# Altium PCB PCB_Control.V03.R00.PcbDoc (part 6 of 7)
Units mm, origin at the board's own origin, x right, y up, seen from the top; angles counter-clockwise.
Board outline 188 x 90 mm, 6 copper layers (Top Layer, GND 1, PWR, Signal L4, GND 2, Bottom Layer), stack 1.548 mm thick; 541 components, 265 nets, 1491 pads, 2159 vias.
Unrouted connection lines stored in the file: 819.
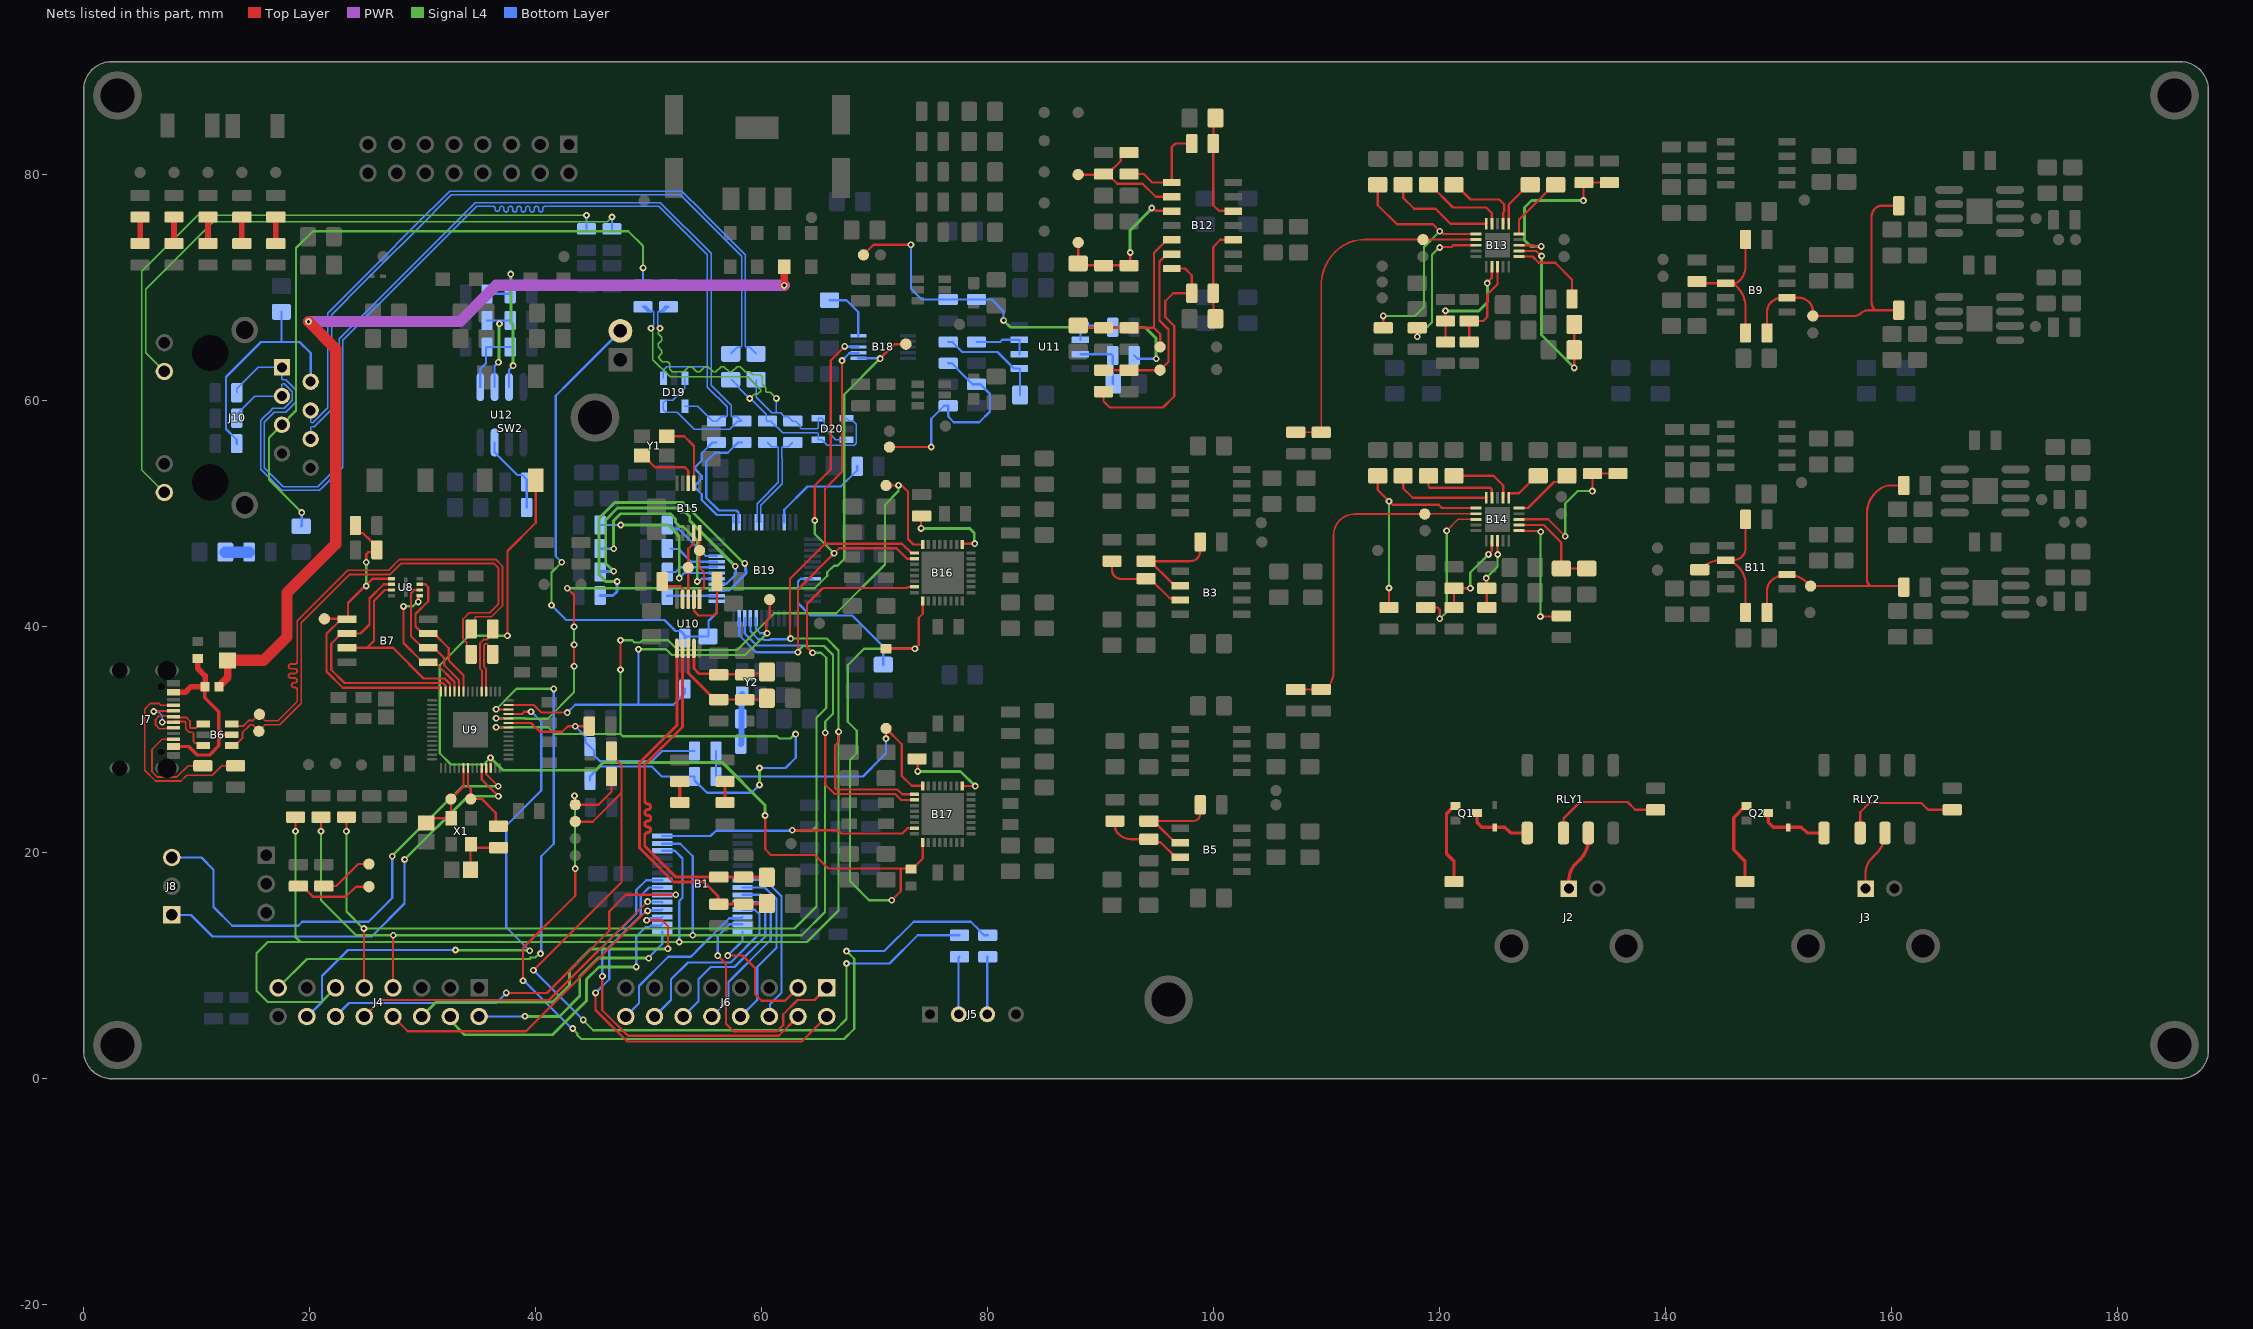
[diagram p9: the nets of this part, all layers, seen from the top]

## Via types
v1: diameter 0.6, hole 0.3, Top Layer to Bottom Layer, tented both sides, 1686 vias
v2: diameter 0.6, hole 0.3, Top Layer to Bottom Layer, 448 vias
v3: diameter 0.5, hole 0.2, Top Layer to Bottom Layer, tented both sides, 16 vias
v4: diameter 0.6, hole 0.25, Top Layer to Bottom Layer, tented both sides, 9 vias

## Nets (pads, with @x,y where several pads share a name; then routed paths per layer and width w, separated by ;. In a path a pad name is that pad's centre, name@x,y a point inside that pad or via, vN(x,y) a via of type N, cw(c..) or ccw(c..) an arc to the next point about the centre after c; other vN are vias at no path point) (continued)
MCU_GPIO24: B16.32 R38.2 R40.1 TP22.1 U9.36 | length 103.2
  Top Layer w0.2: v1(36.5,31.1) 36.518,31.082 U9.36@37.592,31.082 ; v1(47.5,36.2) v1(47.5,38.8) ; TP22.1@71,52.5 v1(72.1,52.5) 72.4,52.5 72.95,51.95 72.95,47.75 73.429,47.271 B16.32@74.25,47.271
  Signal L4 w0.2: v1(36.5,31.1) 41.1,31.1 41.7,30.5 47.5,30.5 ; v1(47.5,36.2) 47.5,30.5 ; v1(47.5,38.8) 48.551,38.8 48.751,38.6 49.249,38.6 49.449,38.8 51.7,38.8 52.566,37.934 57.834,37.934 61.1,41.2 66.6,41.2 70.9,45.5 70.9,50.8 72.1,52 v1(72.1,52.5) ; v1(63,30.5) 62.951,30.5 62.551,30.1 61.549,30.1 61.349,30.3 47.7,30.3 47.5,30.5
  Signal L4 w0.254: v1(59.8,26) v1(59.8,27.5)
  Bottom Layer w0.2: R38.2@44.8,26.4 44.8,26.736 45.689,27.625 50.275,27.625 51.15,26.75 R40.1@54.05,26.75 54.05,26.4 55.15,25.3 59.1,25.3 v1(59.8,26) ; v1(59.8,27.5) 62.1,27.5 63,28.4 v1(63,30.5)
MCU_GPIO25: R39.2 R41.1 R46.1 U9.37 | length 20.4
  Top Layer w0.2: U9.37@37.592,31.482 39.594,31.482 40.376,30.7 42.349,30.7 42.849,31.2 v1(43.5,31.2) R46.1@44.75,31.2
  Bottom Layer w0.2: v1(43.5,31.2) 44.415,30.285 44.415,29.785 45.185,29.015 45.185,28.615 45.7,28.1 50.3,28.1 51.2,29 R41.1@54.05,29
MCU_GPIO26: B18.6 TP44.1 U9.38 | length 68
  Top Layer w0.2: v1(36.5,31.9) 36.518,31.882 U9.38@37.592,31.882 ; v1(42.8,43.4) 43.4,42.8 v1(43.4,40) ; v1(43.4,36.5) v1(43.4,38.4) ; v1(70.475,63.725) 71.75,65 TP44.1@72.75,65
  Signal L4 w0.2: v1(36.5,31.9) 39.029,31.9 39.062,31.867 41.067,31.867 43.4,34.2 v1(43.4,36.5) ; v1(42.8,43.4) 53.083,43.4 53.088,43.396 64.696,43.396 65.8,44.5 65.8,44.814 66.386,45.4 66.7,45.4 67.3,46 67.3,60.55 v1(70.475,63.725) ; v1(43.4,38.4) v1(43.4,40)
  Bottom Layer w0.2: B18.6@68.55,63.75 70.45,63.75 v1(70.475,63.725)
MCU_GPIO27: J4.14 U9.39 | length 49.3
  Top Layer w0.2: U9.39@37.592,32.282 38.812,32.282 38.997,32.467 v1(39.585,32.467)
  Signal L4 w0.2: v1(32.9,11.4) 32.937,11.363 39.437,11.363 v1(39.474,11.326)
  Bottom Layer w0.2: J4.14@19.75,5.51 19.81,5.51 21.1,6.8 21.1,9.1 23.4,11.4 v1(32.9,11.4) ; v1(39.474,11.326) 37.4,13.4 37.4,22.4 40.5,25.5 40.5,31.6 39.633,32.467 v1(39.585,32.467)
MCU_GPIO28: J4.15 U9.40 | length 55.3
  Top Layer w0.2: v1(36.5,32.7) 36.518,32.682 U9.40@37.592,32.682
  Signal L4 w0.2: J4.15@17.21,8.05 19.76,10.6 39.449,10.6 39.574,10.726 39.969,10.726 40.317,11.074 v1(40.426,11.074) ; v1(36.5,32.7) 38.3,34.5 v1(41.6,34.5)
  Bottom Layer w0.2: v1(40.426,11.074) 40.5,11.149 40.5,19.7 41.6,20.8 v1(41.6,34.5)
MCU_GPIO29: B19.32 R154.2 TP85.1 U9.41 | length 39.5
  Top Layer w0.2: U9.41@37.592,33.082 39.818,33.082 40.5,32.4 v1(42.8,32.4) ; v1(60.474,39.426) 60.4,39.5 60.4,40.5 60.7,40.8 TP85.1@60.7,42.4
  Signal L4 w0.2: v1(49.1,38) 51.531,38 52.031,37.5 58.549,37.5 v1(60.474,39.426)
  Bottom Layer w0.2: v1(42.8,32.4) 43.5,33.1 49.1,33.1 ; v1(49.1,38) 49.1,33.1 ; R154.2@53.2,34.5 53.2,34.136 52.164,33.1 49.1,33.1 ; B19.32@59.5,40.762 59.5,39.8 59.874,39.426 v1(60.474,39.426)
MCU_QSPI_SCLK: B7.6 U8.6 U9.52 | length 12
  Top Layer w0.2: U8.6@29.7,43.2 U8.6@29.75,43.25 29.25,43.25 28.975,42.975 28.975,39.155 30,38.13 B7.6@30.5,38.13 31,38.13 31.9,37.23 31.9,36.587 33.217,35.27 U9.52@33.217,34.257
MCU_QSPI_SD0: B7.5 U8.5 U9.53 | length 12.2
  Top Layer w0.2: v1(28.3,41.8) 28.3,38.56 30,36.86 B7.5@30.5,36.86 30.725,36.635 31.286,36.635 32.817,35.104 U9.53@32.817,34.257 ; v1(29.604,42.196) 29.604,42.7 29.654,42.75 U8.5@29.75,42.75
  Signal L4 w0.2: v1(28.3,41.8) 29.151,41.8 29.548,42.196 v1(29.604,42.196)
MCU_QSPI_SD1: B7.2 U8.2 U9.55 | length 22.4
  Top Layer w0.2: U8.2@27.25,43.75 26.55,43.75 25.3,42.5 25.3,40.2 24.5,39.4 B7.2@23.3,39.4 22.8,39.4 21.9,38.5 21.9,36.2 23.081,35.019 31.771,35.019 32.017,34.773 U9.55@32.017,34.257
MCU_QSPI_SD2: B7.3 U8.3 U9.54 | length 17.6
  Top Layer w0.2: B7.3@23.3,38.13 25.07,38.13 ; U8.3@27.2,43.2 U8.3@27.25,43.25 26.65,43.25 25.7,42.3 25.7,38.76 25.07,38.13 ; U9.54@32.417,34.257 32.417,34.938 31.936,35.419 30.081,35.419 27.37,38.13 25.07,38.13
MCU_QSPI_SD3: B7.7 U8.7 U9.51 | length 13
  Top Layer w0.2: U8.7@29.8,43.7 U8.7@29.75,43.75 30.247,43.75 30.5,43.497 30.5,42.244 29.375,41.119 29.375,40.025 30,39.4 31,39.4 32.3,38.1 32.3,37.012 33.617,35.695 U9.51@33.617,34.257
MCU_QSPI_SS: B7.1 R66.2 R68.2 TP56.1 U8.1 U9.56 | length 31
  Top Layer w0.2: TP56.1@21.3,40.7 B7.1@22.8,40.7 ; B7.1@22.8,40.67 21.5,39.37 21.5,36.034 22.934,34.6 31.617,34.6 U9.56@31.617,34.257 ; B7.1@23.27,40.7 23.4,40.83 23.4,42.1 24.9,43.6 v1(25,43.6) 25,43.7 25.55,44.25 U8.1@27.25,44.25 ; R66.2@24.05,48.95 24.05,48.698 24.448,48.299 24.701,48.299 25.465,47.535 25.552,47.535 25.95,47.136 R68.2@25.95,46.8 25.75,46.6 25.2,46.6 25,46.4 v1(25,45.7)
  Signal L4 w0.2: v1(25,43.6) v1(25,45.7)
MCU_USB_N: R67.1 U9.46 | length 5.7
  Top Layer w0.16: U9.46@35.617,34.257 35.617,34.618 35.597,34.638 35.597,36.292 35.435,36.454 35.435,38.401 35.529,38.495 35.686,38.495 35.808,38.373 35.808,37.942 R67.1@36.2,37.55
MCU_USB_P: R65.1 U9.47 | length 6.3
  Top Layer w0.16: U9.47@35.217,34.257 35.217,34.618 35.237,34.638 35.237,36.143 35.075,36.305 35.075,38.55 35.38,38.855 35.686,38.855 35.808,38.976 35.808,39.408 R65.1@36.2,39.8
MCU_XIN: C85.2 TP57.1 U9.20 X1.1 | length 7.3
  Top Layer w0.2: C85.2@30.3,22.625 30.725,23.05 X1.1@32.525,23.05 32.5,23.075 TP57.1@32.5,24.75 33.614,25.864 33.614,26.954 33.617,26.957 U9.20@33.617,27.507
MCU_XOUT: R69.2 TP58.1 U9.21 | length 6.9
  Top Layer w0.2: U9.21@34.017,27.507 34.017,25.883 34.25,25.65 TP58.1@34.25,24.75 35.25,24.75 36.473,23.527 36.473,22.577 R69.2@36.7,22.35
NetB13_11: B13.11 R96.2 | length 7.2
  Top Layer w0.2: B13.11@127,72.75 128.201,72.75 128.751,72.2 130.2,72.2 131.7,70.7 R96.2@131.7,69
NetB13_12: B13.12 C115.2 C116.2 | length 17.1
  Top Layer w0.2: B13.12@127,73.25 128.529,73.25 128.979,72.8 v1(129,72.8) ; C116.2@131.893,66.75 C115.2@131.893,64.5 131.9,64.493 v1(131.9,62.9)
  Signal L4 w0.254: v1(129,72.8) 129,65.8 v1(131.9,62.9)
NetB14_11: B14.11 R105.2 | length 11.4
  Top Layer w0.2: B14.11@127,48.5 127.025,48.475 128.851,48.475 v1(128.926,48.4) ; v1(128.9,40.9) 130.7,40.9 R105.2@130.75,40.95
  Signal L4 w0.2: v1(128.9,40.9) 128.913,40.913 128.913,42.667 128.9,42.68 128.9,43.177 128.913,43.19 128.913,48.387 v1(128.926,48.4)
NetB14_12: B14.12 C126.2 C127.2 | length 8.9
  Top Layer w0.2: B14.12@127,49 129.2,49 130.75,47.45 C126.2@130.75,45.143 C127.2@133,45.143
NetB16_25: B16.25 R108.1 | length 8.1
  Top Layer w0.2: v1(74.1,48.7) 74.1,49.75 R108.1@74.15,49.8 ; B16.25@77.75,47.271 77.75,47.301 77.8,47.351 v1(78.851,47.351)
  Signal L4 w0.254: v1(74.1,48.7) 78.4,48.7 78.8,48.3 78.8,47.402 v1(78.851,47.351)
NetB17_25: B17.25 R111.1 | length 7.9
  Top Layer w0.2: R111.1@73.75,28.3 73.8,28.25 v1(73.8,27.2) ; B17.25@77.75,25.925 77.775,25.9 v1(78.901,25.901) v1(78.901,25.901)
  Signal L4 w0.254: v1(73.8,27.2) 77.6,27.2 78.899,25.901 v1(78.901,25.901)
NetB17_32: B17.32 R40.2 R41.2 TP23.1 | length 27.3
  Top Layer w0.2: v1(71,30.1) TP23.1@71,31 72.4,29.6 72.4,26.8 73.275,25.925 B17.32@74.25,25.925
  Bottom Layer w0.2: R41.2@55.95,29 R40.2@55.95,26.75 68.95,26.75 70.6,28.4 71,28.8 v1(71,30.1)
NetB18_10: B18.10 C174.1 | length 5.1
  Bottom Layer w0.2: C174.1@66,68.893 67.507,68.893 68.55,67.85 B18.10@68.55,65.75
NetB19_10: B19.10 R164.2 | length 9.4
  Bottom Layer w0.2: B19.10@62,49.238 62,50.351 64.049,52.4 67,52.4 68.45,53.85 R164.2@68.45,54.2
NetC173_2: C173.2 R125.2 U11.3 | length 5.4
  Bottom Layer w0.2: U11.3@88.2,64.115 90.935,64.115 R125.2@91.05,64 91.05,61.557 C173.2@91.107,61.5
NetC175_2: C175.2 R129.2 U11.5 | length 9.6
  Bottom Layer w0.2: R129.2@76.5,65.2 76.85,65.2 77.75,64.3 80.87,64.3 82.325,62.845 U11.5@82.8,62.845 82.857,62.788 C175.2@82.857,60.5
NetC183_1: C183.1 J10.2 R150.1 | length 20.7
  Bottom Layer w0.2: R150.1@13.55,56.2 13.55,56.55 12.6,57.5 12.6,62.1 15.7,65.2 17.5,65.2 ; C183.1@17.5,67.857 17.5,65.2 ; J10.2@20.09,61.68 20.09,64.21 19.1,65.2 17.5,65.2
NetC186_2: C186.2 R162.1 | length 2.1
  Bottom Layer w1: C186.2@12.543,46.6 R162.1@14.65,46.6
NetD5_A: D5.A R1.1 | length 2.4
  Top Layer w0.5: D5.A@17,73.9 R1.1@17,76.25
NetD6_A: D6.A R2.1 | length 2.4
  Top Layer w0.5: D6.A@14,73.9 R2.1@14,76.25
NetD7_A: D7.A R3.1 | length 2.4
  Top Layer w0.5: D7.A@11,73.9 R3.1@11,76.25
NetD8_K: D8.K R4.1 | length 2.4
  Top Layer w0.5: D8.K@8,73.9 R4.1@8,76.25
NetD9_K: D9.K R5.1 | length 2.4
  Top Layer w0.5: D9.K@5,73.9 R5.1@5,76.25
NetD11_2: D11.2 Q1.3 RLY1.1 | length 5.7
  Top Layer w0.3: Q1.3@123.29,23.5 123.29,22.676 123.711,22.255 D11.2@124.84,22.255 125.745,22.255 126.25,21.75 RLY1.1@127.739,21.75
NetD12_2: D12.2 Q2.3 RLY2.1 | length 6.1
  Top Layer w0.3: Q2.3@149.04,23.5 149.04,22.71 149.5,22.25 150.835,22.25 D12.2@150.84,22.255 151.995,22.255 152.5,21.75 RLY2.1@153.989,21.75
NetD13_A: D13.A R49.1 | length 1.8
  Top Layer w0.3: D13.A@52.75,24.45 R49.1@52.75,26.3
NetD14_A: D14.A R50.1 | length 1.8
  Top Layer w0.3: D14.A@56.75,24.45 R50.1@56.75,26.3
NetJ10_10: J10.10 R152.1 | length 52.9
  Signal L4 w0.152: J10.10@7.14,62.59 5.5,64.23 5.5,69.848 11.476,75.824 46.324,75.824 v1(46.75,76.25)
  Bottom Layer w0.2: R152.1@46.75,75.2 v1(46.75,76.25)
NetJ10_12: J10.12 R153.1 | length 63
  Signal L4 w0.152: J10.12@7.14,51.88 5.148,53.872 5.148,71.463 10.085,76.4 v1(44.5,76.4)
  Bottom Layer w0.2: R153.1@44.5,75.2 v1(44.5,76.4)
NetQ1_1: Q1.1 R18.1 | length 7.4
  Top Layer w0.3: R18.1@121.25,17.45 121.25,19.25 120.59,19.91 120.59,23.45 121.29,24.15 Q1.1@121.39,24.15
NetQ2_1: Q2.1 R20.1 | length 7.6
  Top Layer w0.3: R20.1@147,17.45 147,19.25 146,20.25 146,23.11 147.04,24.15 Q2.1@147.14,24.15
NetR124_1: R124.1 R125.1 R127.2 TP82.1 | length 36.3
  Top Layer w0.2: TP82.1@69,72.9 69.9,73.8 v1(73.2,73.8)
  Signal L4 w0.254: v1(81.4,67.1) 82,66.5 93.9,66.5 94.9,65.5 v1(94.9,63.7)
  Bottom Layer w0.2: v1(73.2,73.8) 73.2,69.9 74.15,68.95 R124.1@76.5,68.95 R127.2@79,68.95 80.35,68.95 81.4,67.9 v1(81.4,67.1) ; R125.1@92.95,64 93.25,63.7 v1(94.9,63.7)
NetR126_1: R126.1 U11.1 U11.2 | length 4.2
  Bottom Layer w0.2: U11.2@88.2,65.385 U11.1@88.2,66.655 90.895,66.655 R126.1@91.05,66.5
NetR128_1: R128.1 R129.1 R131.2 TP84.1 | length 19.8
  Top Layer w0.2: TP84.1@71.3,55.9 v1(75,55.9)
  Bottom Layer w0.2: v1(75,55.9) 75,58.4 76.15,59.55 R128.1@76.5,59.55 76.5,58.6 77,58.1 79.251,58.1 80.2,59.049 80.2,60.6 79.35,61.45 R131.2@79,61.45 78.65,61.45 77.235,62.865 77.235,62.902 76.836,63.3 R129.1@76.5,63.3
NetR130_1: R130.1 U11.6 U11.7 | length 5.1
  Bottom Layer w0.2: R130.1@79,65.2 81.1,65.2 81.285,65.385 U11.7@82.8,65.385 U11.6@82.8,64.115
NetR132_1: R132.1 R136.1 U12.7 | length 7.2
  Bottom Layer w0.2: U12.7@36.365,56.3 36.365,55.436 38.376,53.425 38.802,53.425 39.2,53.027 R136.1@39.2,52.8 R132.1@39.2,50.55
NetR133_1: R133.1 R137.2 U12.1 | length 5.9
  Bottom Layer w0.2: U12.1@35.095,61.2 35.095,62.795 35.6,63.3 35.6,64.65 R133.1@35.7,64.75 R137.2@37.75,64.75
NetR134_1: R134.1 R138.2 U12.2 | length 8.1
  Signal L4 w0.254: v1(36.7,63.4) 36.75,63.45 36.75,66.75 v1(36.8,66.8)
  Bottom Layer w0.2: R134.1@35.7,67.1 v1@36.8,67.1 ; U12.2@36.365,61.2 36.365,63.065 v1(36.7,63.4) ; v1(36.8,66.8) v1@36.8,67.1 ; R138.2@37.75,67.1 v1@36.8,67.1
NetR135_1: R135.1 R139.2 U12.3 | length 14.1
  Signal L4 w0.254: v1(37.8,71.2) 37.8,66.9 38,66.7 v1(38,63.1)
  Bottom Layer w0.2: R135.1@35.7,69.45 R139.2@37.75,69.45 37.8,69.5 v1(37.8,71.2) ; U12.3@37.635,61.2 37.635,62.735 v1(38,63.1)
NetR166_2: R166.2 R167.2 Y2.1 | length 4.5
  Bottom Layer w0.5: R166.2@58.15,29.6 58.213,29.663 58.213,33.987 Y2.1@58.275,34.05
NEXTION_RX: J5.3 R42.2 | length 5.1
  Bottom Layer w0.2: J5.3@79.96,5.7 79.96,10.76 R42.2@80,10.8
NEXTION_TX: J5.2 R44.2 | length 5.1
  Bottom Layer w0.2: J5.2@77.42,5.7 77.42,10.72 R44.2@77.5,10.8
OFFSET_VIN_Offset1: B9.2 R70.2 R71.1 R72.2 | length 11.7
  Top Layer w0.2: R70.2@142.75,70.55 ccw(c143.148,70.948) 143.148,70.385 B9.2@145.288,70.385 ; R71.1@147.05,66 147.05,68.264 ccw(c144.51,68.264) 146.306,70.06 145.981,70.385 ccw(c145.981,71.119) 146.5,70.6 ccw(c145.172,71.928) 147.05,71.928 R72.2@147.05,74.25
OFFSET_VIN_Offset2: B11.2 R75.2 R76.1 R77.2 | length 12.2
  Top Layer w0.2: R75.2@143,45.05 143.091,45.141 cw(c144.887,43.345) B11.2@144.887,45.885 ; B11.2@145.288,45.885 B11.2@145.638,45.819 ; B11.2@145.76,45.794 B11.2@145.638,45.818 ; B11.2@145.759,45.886 145.95,45.887 ccw(c145.936,47.057) 146.761,46.227 ccw(c146.07,46.922) 147.05,46.92 147.05,48.775 R77.2@147.05,49.5 ; R76.1@147.05,41.25 147.05,43.749 ccw(c144.815,43.741) 145.951,45.666 B11.2@145.638,45.819
OFFSET_VOUT_Amplificador1: B9.6 R7.1 R10.1 R71.2 TP62.1 | length 26.8
  Top Layer w0.2: R71.2@148.95,66 148.95,67.855 cw(c150.145,67.855) 149.3,68.7 cw(c150.302,67.698) 150.302,69.115 B9.6@150.712,69.115 151.698,69.115 cw(c151.698,67.698) 152.7,68.7 cw(c151.976,67.976) 153,67.976 TP62.1@153,67.5 156.717,67.5 ccw(c156.717,68.183) 157.2,67.7 cw(c157.924,66.976) 157.924,68 158.5,68 ; R10.1@160.6,68 158.5,68 ; R7.1@160.6,77.25 159.104,77.25 ccw(c159.104,76.396) 158.5,77 ccw(c159.224,76.276) 158.2,76.276 158.2,68.724 ccw(c159.224,68.724) 158.5,68
OFFSET_VOUT_Amplificador2: B11.6 R13.1 R16.1 R76.2 TP67.1 | length 26.4
  Top Layer w0.2: R76.2@148.95,41.25 148.95,43.237 ; 148.95,43.238 cw(c150.055,43.238) 149.274,44.019 cw(c150.712,42.581) 150.05,44.504 B11.6@150.712,44.615 150.733,44.615 cw(c150.733,42.075) 152.529,43.871 TP67.1@152.8,43.6 158.1,43.6 ; R16.1@161.05,43.5 ccw(c160.809,43.259) 160.809,43.6 158.1,43.6 ; R13.1@161.05,52.5 159.907,52.5 ccw(c159.907,50.793) 158.7,52 ccw(c160.323,50.068) 157.8,50.069 157.8,44.099 ccw(c158.283,44.1) 157.94,43.76 157.942,43.758 158.1,43.6
OPA41971_+IN_A: B12.3 C108.2 R83.2 R84.2 TP70.1 | length 14.3
  Top Layer w0.2: TP70.1@88,74 C108.2@88,72.143 88.172,71.971 90.25,71.971 92.479,71.971 R84.2@92.5,71.95 92.6,72.05 v1(92.6,73.107) ; v1(94.5,77.05) 94.608,77.05 94.858,76.8 96.258,76.8 B12.3@96.288,76.77
  Signal L4 w0.254: v1(92.6,73.107) 92.6,75.08 94.5,76.98 v1(94.5,77.05)
OPA41971_+IN_B: B12.5 C110.2 R88.2 R89.2 TP72.1 | length 17.4
  Top Layer w0.2: C110.2@88,66.643 88.172,66.472 92.479,66.472 R89.2@92.5,66.45 94.7,66.45 ; TP72.1@95.25,64.75 95.25,65.9 94.7,66.45 ; B12.5@96.288,74.23 95.851,74.23 94.7,73.079 94.7,66.45
OPA41971_+IN_C: B12.10 C109.2 R85.2 | length 8.5
  Top Layer w0.2: C109.2@100.143,67.25 99.972,67.421 99.972,69.478 R85.2@99.95,69.5 99.95,73.6 100.58,74.23 B12.10@101.712,74.23
OPA41971_+IN_D: B12.12 C107.1 R80.2 | length 9.8
  Top Layer w0.2: C107.1@100.143,85 99.972,84.828 99.972,82.771 R80.2@99.95,82.75 99.95,77.3 100.45,76.8 101.682,76.8 B12.12@101.712,76.77
OPA41971_-IN_A: B12.2 R81.1 R82.2 TP69.1 | length 12
  Top Layer w0.2: TP69.1@88,80 90.2,80 R82.2@90.25,80.05 R82.2@90.6,80.05 ; R81.1@92.5,81.95 92.164,81.95 91.765,81.552 91.765,81.215 R82.2@90.6,80.05 ; B12.2@96.288,78.04 94.86,78.04 93.7,79.2 91.45,79.2 R82.2@90.6,80.05
OPA41971_-IN_B: B12.6 R86.1 R87.2 TP71.1 | length 16.6
  Top Layer w0.2: R86.1@90.25,62.7 R87.2@92.5,62.7 TP71.1@95.25,62.7 96,63.45 96,66.3 95.2,67.1 95.2,72.309 95.851,72.96 B12.6@96.288,72.96
OPA41971_OUTA: B12.1 R80.1 R81.2 | length 9.1
  Top Layer w0.2: R81.2@92.5,80.05 93.8,80.05 94.55,79.3 96.278,79.3 B12.1@96.288,79.31 96.288,82.438 96.6,82.75 R80.1@98.05,82.75
OPA41971_OUTB: B12.7 R85.1 R86.2 | length 22.7
  Top Layer w0.2: R86.2@90.25,60.8 90.25,59.95 90.8,59.4 95.5,59.4 96.5,60.4 96.5,66.6 95.7,67.4 95.7,68.8 96.4,69.5 R85.1@98.05,69.5 98.05,71.1 97.46,71.69 B12.7@96.288,71.69
PE4312_C0.5_Atenuador_Digital_Pasos1: B13.20 C118.2 | length 9.5
  Top Layer w0.2: C118.2@116.75,79.107 116.75,77.95 117.725,76.975 119.625,76.975 120.95,75.65 B13.20@124.1,75.65
PE4312_C0.5_Atenuador_Digital_Pasos2: B14.20 C129.2 | length 8.8
  Top Layer w0.2: C129.2@116.75,53.357 116.75,52.25 117.6,51.4 B14.20@124.1,51.4
PE4312_C1_Atenuador_Digital_Pasos1: B13.19 C119.2 | length 7.6
  Top Layer w0.2: C119.2@119,79.107 119.15,79.107 121.157,77.1 124.1,77.1 124.6,76.6 B13.19@124.6,75.65
PE4312_C1_Atenuador_Digital_Pasos2: B14.19 C130.2 | length 7.4
  Top Layer w0.2: C130.2@119,53.357 119,52.417 119.117,52.3 124.483,52.3 124.6,52.183 B14.19@124.6,51.4
PE4312_C2_Atenuador_Digital_Pasos1: B13.17 C120.2 | length 6.9
  Top Layer w0.2: C120.2@121.25,79.107 121.4,79.107 122.707,77.8 125.249,77.8 125.7,77.349 125.7,76.749 125.6,76.649 B13.17@125.6,75.65
PE4312_C2_Atenuador_Digital_Pasos2: B14.17 C131.2 | length 5.8
  Top Layer w0.2: C131.2@121.25,53.357 124.743,53.357 125.6,52.5 B14.17@125.6,51.4
PE4312_C4_Atenuador_Digital_Pasos1: B13.16 C121.2 | length 4.3
  Top Layer w0.2: B13.16@126.1,75.65 126.1,77.357 127.85,79.107 C121.2@128,79.107
PE4312_C4_Atenuador_Digital_Pasos2: B14.16 C132.2 | length 3.6
  Top Layer w0.2: B14.16@126.1,51.4 126.1,51.775 126.125,51.8 126.993,51.8 128.55,53.357 C132.2@128.7,53.357
PE4312_C8_Atenuador_Digital_Pasos1: B13.15 C122.2 | length 5.8
  Top Layer w0.2: B13.15@127,74.75 127,76.007 130.1,79.107 C122.2@130.25,79.107
PE4312_C8_Atenuador_Digital_Pasos2: B14.15 C133.2 | length 5.4
  Top Layer w0.2: B14.15@127,50.5 127.801,50.5 130.105,52.803 130.696,52.803 C133.2@131.25,53.357
PE4312_C16_Atenuador_Digital_Pasos1: B13.1 C123.2 R94.2 | length 23.8
  Top Layer w0.2: C123.2@114.5,79.107 114.5,77.3 116.2,75.6 119.4,75.6 v1(120,75) 120.067,75 120.317,74.75 B13.1@123.2,74.75 ; R94.2@115,66.45 v1(115,67.5)
  Signal L4 w0.2: v1(115,67.5) 117.8,67.5 118.6,68.3 118.6,73.6 v1(120,75)
PE4312_C16_Atenuador_Digital_Pasos2: B14.1 C134.2 R103.2 | length 20
  Top Layer w0.2: C134.2@114.5,53.357 114.5,52.1 v1(115.5,51.1) 115.517,51.1 115.817,50.8 119.9,50.8 120.2,50.5 B14.1@123.2,50.5 ; R103.2@115.5,41.7 v1(115.5,43.428)
  Signal L4 w0.2: v1(115.5,43.428) v1(115.5,51.1)
PE4312_DATA_Atenuador_Digital_Pasos1: B13.3 R95.2 | length 12.8
  Top Layer w0.2: v1(118,65.65) R95.2@118,66.45 ; v1(120,73.55) 120.05,73.6 121.034,73.6 121.184,73.75 B13.3@123.2,73.75
  Signal L4 w0.2: v1(118,65.65) 119.3,66.95 119.3,72.9 119.95,73.55 v1(120,73.55)
PE4312_DATA_Atenuador_Digital_Pasos2: B14.3 R104.2 | length 13.2
  Top Layer w0.152: v1(120.6,48.5) 121.6,49.5 B14.3@123.2,49.5
  Top Layer w0.2: R104.2@118.75,41.7 119.8,41.7 120,41.5 v1(120,40.7)
  Signal L4 w0.2: v1(120,40.7) 120.6,41.3 v1(120.6,48.5)
PE4312_P/S_Atenuador_Digital_Pasos1: B13.13 R97.1 R98.2 | length 15.9
  Top Layer w0.2: B13.13@127,73.75 128.277,73.75 128.377,73.65 v1(128.977,73.65) ; v1(132.7,77.7) 132.7,79.25 R98.2@132.75,79.3 R97.1@135,79.3
  Signal L4 w0.254: v1(128.977,73.65) 128.05,73.65 127.5,74.2 127.5,77.1 128.1,77.7 v1(132.7,77.7)
PE4312_P/S_Atenuador_Digital_Pasos2: B14.13 R106.1 R107.2 | length 14.3
  Top Layer w0.2: B14.13@127,49.5 129.6,49.5 v1(131.1,48) ; v1(133.5,52) R107.2@133.5,53.55 R106.1@135.75,53.55
  Signal L4 w0.2: v1(131.1,48) 131.1,50.9 132.2,52 v1(133.5,52)
PE4312_PUP1_Atenuador_Digital_Pasos1: B13.7 R90.1 R92.2 | length 10.1
  Top Layer w0.2: R92.2@120.5,65.2 v1(120.5,67.95) ; v1(124.2,70.4) 124.2,70.449 124.6,70.849 B13.7@124.6,71.85
  Signal L4 w0.254: v1(120.5,67.95) 123.45,67.95 124.2,68.7 v1(124.2,70.4)
PE4312_PUP1_Atenuador_Digital_Pasos2: B14.7 R99.1 R101.2 | length 8.1
  Top Layer w0.2: R99.1@121.25,41.7 R101.2@121.25,43.4 v1(122.7,43.4) ; v1(124.3,46.4) 124.3,46.417 124.6,46.717 B14.7@124.6,47.6
  Signal L4 w0.2: v1(122.7,43.4) 122.7,44.8 v1(124.3,46.4)
PE4312_PUP2_Atenuador_Digital_Pasos1: B13.8 R91.1 R93.2 | length 8.4
  Top Layer w0.2: R93.2@122.6,65.2 R91.1@122.6,67.05 123.85,67.05 124.2,67.4 124.2,69.4 125.1,70.3 B13.8@125.1,71.85
PE4312_PUP2_Atenuador_Digital_Pasos2: B14.8 R100.1 R102.2 | length 6.3
  Top Layer w0.2: v1(124.1,44.3) 124.1,43.45 R100.1@124.15,43.4 R102.2@124.15,41.7 ; B14.8@125.1,47.6 125.107,47.593 125.107,46.399 v1(125.114,46.391)
  Signal L4 w0.2: v1(124.1,44.3) 125.1,45.3 125.1,46.377 v1(125.114,46.391)
PE4312_RFIN_Atenuador_Digital_Pasos1: B13.2 R23.2 R24.2 TP74.1 | length 31.3
  Top Layer w0.16: R24.2@107.25,57.2 R23.2@109.5,57.2 109.5,70.147 ; 109.5,70.148 cw(c113.796,70.148) 110.758,73.186 cw(c113.328,70.616) 113.328,74.25 TP74.1@118.5,74.25 B13.2@123.2,74.25
PE4312_RFIN_Atenuador_Digital_Pasos2: B14.2 R26.2 R27.2 TP78.1 | length 30.1
  Top Layer w0.16: R27.2@107.25,34.45 R26.2@109.5,34.45 110.225,34.799 ccw(c108.2,36.087) 110.6,36.074 110.6,36.088 110.6,48.1 cw(c112.462,48.1) 112.462,49.962 TP78.1@118.663,49.962 cw(c118.753,49.872) 118.753,50 B14.2@123.2,50
PMODE0: B19.45 R148.1 | length 5.2
  Bottom Layer w0.2: R148.1@51.95,49 52.283,48.667 52.633,48.667 55.05,46.25 B19.45@56.012,46.25
PMODE1: B19.44 R147.1 | length 4.5
  Bottom Layer w0.2: R147.1@51.95,46.917 52,46.867 52.633,46.867 53.75,45.75 B19.44@56.012,45.75
PMODE2: B19.43 R146.2 | length 4.5
  Bottom Layer w0.2: R146.2@51.65,44.833 52.385,44.833 52.801,45.25 B19.43@56.012,45.25
PULSADOR_0: B1.1 J4.2 | length 21
  Signal L4 w0.254: v1(39.05,5.525) 42.1,5.525 43.9,7.325 43.9,9.05 45.525,10.675 50,10.675 v1(50.012,10.663)
  Bottom Layer w0.2: J4.2@34.99,5.51 34.998,5.517 39.043,5.517 v1(39.05,5.525) ; v1(50.012,10.663) 50.012,10.737 51.2,11.925 B1.1@51.2,13.025
PULSADOR_1: B1.2 J4.4 | length 26.4
  Signal L4 w0.254: J4.4@32.45,5.51 32.45,5.159 33.709,3.9 41.5,3.9 44.5,6.9 44.5,8.8 45.6,9.9 v1(48.9,9.9)
  Bottom Layer w0.2: v1(48.9,9.9) 48.9,12.6 49.728,13.428 50.054,13.428 50.176,13.55 51.075,13.55 B1.2@51.2,13.675
PULSADOR_2: B1.3 J4.6 | length 30.6
  Top Layer w0.2: v1(49.815,14.03) 51.17,14.03 51.7,13.5 v1(51.7,11.5)
  Signal L4 w0.254: J4.6@29.91,5.51 31.2,6.8 41.5,6.8 43,8.3 43,9.6 44.9,11.5 v1(51.7,11.5)
  Bottom Layer w0.2: v1(49.815,14.03) 49.923,14.03 50.094,14.2 51.075,14.2 B1.3@51.2,14.325
PULSADOR_3: B1.4 J4.8 | length 28.8
  Top Layer w0.2: J4.8@27.37,5.51 28.68,4.2 39.14,4.2 49.215,14.275 49.215,14.278 49.567,14.63 49.57,14.63 49.797,14.856 v1(49.905,14.856)
  Bottom Layer w0.2: v1(49.905,14.856) 49.964,14.916 51.141,14.916 B1.4@51.2,14.975
PULSADOR_4: B1.5 J4.10 | length 30.6
  Top Layer w0.2: J4.10@24.83,5.51 26.295,6.975 41.175,6.975 49.875,15.675 v1(49.9,15.675)
  Bottom Layer w0.2: v1(49.9,15.675) 49.925,15.65 51.175,15.65 B1.5@51.2,15.625
PULSADOR_5: B1.6 J4.12 | length 36.8
  Top Layer w0.2: v1(37.4,7.6) 41,7.6 46.5,13.1 46.5,14.8 47.975,16.275 v1(52.4,16.275)
  Bottom Layer w0.2: J4.12@22.29,5.51 23.48,6.7 36.5,6.7 v1(37.4,7.6) ; B1.6@51.2,16.275 v1(52.4,16.275)
PULSADOR_6: B1.7 J6.2 | length 36.5
  Top Layer w0.2: v1(45.3,7.6) 45.3,6.094 48.094,3.3 63.54,3.3 J6.2@65.75,5.51
  Bottom Layer w0.2: v1(45.3,7.6) 46.5,8.8 46.5,11.663 49.3,14.463 49.3,16.2 50.025,16.925 B1.7@51.2,16.925
PULSADOR_7: B1.8 J6.4 | length 33.5
  Top Layer w0.2: v1(45.9,9.074) 45.9,6.06 48.16,3.8 61.5,3.8 J6.4@63.21,5.51
  Bottom Layer w0.2: v1(45.9,9.074) 45.9,11.629 48.9,14.629 48.9,16.7 49.775,17.575 B1.8@51.2,17.575
PULSADOR_8: B1.21 J6.6 | length 15.1
  Bottom Layer w0.2: B1.21@58.3,17.575 58.325,17.6 60.3,17.6 60.4,17.5 61.745,16.155 61.745,7.605 60.725,6.585 60.725,5.565 J6.6@60.67,5.51
PULSADOR_9: B1.22 J6.8 | length 15.1
  Bottom Layer w0.2: J6.8@58.13,5.51 59.595,6.975 59.595,9.895 61.3,11.6 61.3,15.9 60.275,16.925 B1.22@58.3,16.925
PULSADOR_10: B1.23 J6.10 | length 15
  Bottom Layer w0.2: J6.10@55.59,5.51 55.68,5.6 55.8,5.6 55.8,5.72 57.055,6.975 57.055,8.555 60.8,12.3 60.8,15.4 59.925,16.275 B1.23@58.3,16.275
PULSADOR_11: B1.24 J6.12 | length 16
  Bottom Layer w0.2: J6.12@53.05,5.51 54.404,6.864 54.404,8.804 55.5,9.9 57.6,9.9 60.3,12.6 60.3,14.949 59.624,15.625 B1.24@58.3,15.625
PULSADOR_12: B1.25 J6.14 | length 16.8
  Bottom Layer w0.2: J6.14@50.51,5.51 51.975,6.975 51.975,8.808 53.467,10.3 57.249,10.3 59.8,12.851 59.8,14.55 59.383,14.967 58.308,14.967 B1.25@58.3,14.975
PULSADOR_13: B1.26 J6.16 | length 14.9
  Bottom Layer w0.2: J6.16@47.97,5.51 49.147,6.687 49.147,8.207 51.74,10.8 53.734,10.8 53.834,10.9 53.841,10.9 54.193,11.251 54.193,11.259 57.134,14.2 58.175,14.2 B1.26@58.3,14.325
PULSADOR_14: B1.27 J6.1 | length 22
  Top Layer w0.2: v1(56.1,10.9) 56.838,10.162 56.838,4.862 57.5,4.2 61.334,4.2 61.9,4.766 61.9,5.72 63.155,6.975 64.675,6.975 J6.1@65.75,8.05
  Bottom Layer w0.2: v1(56.1,10.9) 56.1,12.6 57.175,13.675 B1.27@58.3,13.675
PULSADOR_15: B1.28 J6.3 | length 12.4
  Top Layer w0.2: v1(57,10.9) 58.3,10.9 59.4,9.8 59.4,7.5 60,6.9 62.06,6.9 J6.3@63.21,8.05
  Bottom Layer w0.2: v1(57,10.9) 58.3,12.2 B1.28@58.3,13.025
RCT: C187.2 J10.5 R158.1 R159.1 | length 64.4
  Signal L4 w0.2: v1(19.3,50.1) 16.4,53 16.4,56.72 J10.5@17.55,57.87 18.8,59.12 18.8,73.5 20.3,75 48.2,75 49.5,73.7 v1(49.5,71.75)
  Bottom Layer w0.2: C187.2@19.25,48.893 19.3,48.943 v1(19.3,50.1) ; v1(49.5,71.75) R159.1@49.5,70.2 R158.1@51.75,70.2
RD_N: C185.2 J10.6 | length 64
  Bottom Layer w0.13: J10.6@20.09,56.6 20.09,57.629 20.166,57.705 20.42,57.705 21.94,59.224 21.94,62.2 21.94,66.2 21.94,67.61 24.797,70.467 26.215,71.885 29.465,75.135 32.53,78.2 52.8,78.2 58.21,72.79 58.21,64.799 58.121,64.71 57.817,64.71 C185.2@57.25,64.143
RD_P: C184.2 J10.4 | length 64.6
  Bottom Layer w0.13: J10.4@20.09,59.14 20.09,58.111 20.166,58.035 20.284,58.035 21.61,59.361 21.61,62.2 21.61,66.2 21.61,67.746 24.467,70.603 25.982,72.118 29.232,75.368 32.393,78.53 52.937,78.53 54.717,76.75 54.833,76.633 58.54,72.927 58.54,64.799 58.629,64.71 58.933,64.71 C184.2@59.5,64.143
RELE1_CM: J2.1 RLY1.3 | length 5.4
  Top Layer w0.3: J2.1@131.42,16.83 131.42,17.6 cw(c133.4,17.6) 132,19 132.395,19.395 ccw(c130.599,21.191) 133.139,21.191 RLY1.3@133.139,21.75
RELE1_NC: R19.2 RLY1.2 | length 10.3
  Top Layer w0.2: RLY1.2@130.939,21.75 130.939,23.039 132.4,24.5 136.6,24.5 137.3,23.8 R19.2@139.09,23.8
RELE2_CM: J3.1 RLY2.3 | length 5.4
  Top Layer w0.2: J3.1@157.67,16.83 157.67,18.22 cw(c159.48,18.22) 158.2,19.5 158.645,19.945 ccw(c156.849,21.741) 159.389,21.741 RLY2.3@159.389,21.75
RELE2_NC: R21.2 RLY2.2 | length 10.6
  Top Layer w0.2: RLY2.2@157.189,21.75 157.189,23.589 158,24.4 162.6,24.4 163.2,23.8 R21.2@165.34,23.8
RESET: B16.9 B17.9 R177.1 R178.1 SW2.3 U9.26 | length 123.6
  Top Layer w0.2: v1(36,28.4) 36.017,28.383 U9.26@36.017,27.507 ; v1(37.5,39.2) 37.5,46.7 40,49.2 SW2.3@40,52.95 ; v1(60.3,23.3) 60.3,20.3 60.8,19.8 64.7,19.8 65.893,18.607 72.3,18.607 ; R177.1@71,38.05 v1(73.55,38.05) 73.9,38.4 73.9,40.8 74.25,41.15 B16.9@74.25,42.271 ; v1(71.5,15.8) 72.3,16.6 72.3,18.607 ; B17.9@74.25,20.925 74.25,19.5 73.3,18.55 73.243,18.607 72.3,18.607
  Signal L4 w0.2: v1(36,28.4) 35.4,27.8 32.5,27.8 31.5,28.8 31.5,36.6 34.1,39.2 v1(37.5,39.2) ; v1(71.5,15.8) 69.5,15.8 67.8,17.5 67.8,28.2 68.4,28.8 68.4,30.8 67.6,31.6 67.6,36.6 69.05,38.05 v1(73.55,38.05)
  Signal L4 w0.254: v1(36,28.4) 37.1,27.3 45.3,27.3 46,28 56.5,28 60.3,24.2 v1(60.3,23.3)
RSTN: B19.37 C182.2 JMP1.2 R140.2 | length 45.9
  Signal L4 w0.2: v1(41.4,41.9) 41.4,44.8 v1(42.3,45.7)
  Bottom Layer w0.2: v1(41.4,41.9) 42.7,40.6 51.401,40.6 52.376,39.625 52.802,39.625 53.2,39.227 R140.2@53.2,39 53.343,39.143 C182.2@55.25,39.143 55.3,39.193 55.3,40.5 56.012,41.212 B19.37@56.012,42.25 ; v1(42.3,45.7) 41.775,46.225 41.775,60.445 43.026,61.696 JMP1.2@47.5,66.17
RSVD_2: B19.38 R141.2 | length 4.4
  Bottom Layer w0.2: R141.2@51.65,42.75 B19.38@56.012,42.75
RSVD_3: B19.39 R142.2 | length 29.2
  Signal L4 w0.254: v1(47.2,44) 46.2,44 45.6,44.6 45.6,49.6 47,51 53.029,51 54.18,49.848 54.18,49.84 58.421,45.6 v1(58.5,45.6)
  Bottom Layer w0.254: R142.2@45.7,42.75 46.85,42.75 47.2,43.1 v1(47.2,44) ; B19.39@56.012,43.25 57.15,43.25 58.6,44.7 58.6,44.954 58.566,44.988 58.566,45.534 v1(58.5,45.6)
RSVD_4: B19.40 R143.2 | length 23.1
  Signal L4 w0.254: v1(46.9,44.9) 46.2,45.6 46.2,49.451 47.249,50.5 52.5,50.5 52.873,50.127 53.26,50.127 53.627,49.76 53.627,49.373 57.65,45.35 v1(57.663,45.35)
  Bottom Layer w0.2: B19.40@56.012,43.75 56.062,43.8 56.874,43.8 57.7,44.626 57.7,45.313 v1(57.663,45.35)
  Bottom Layer w0.254: R143.2@45.7,44.833 45.767,44.9 v1(46.9,44.9)
RSVD_5: B19.41 R144.2 | length 17.9
  Signal L4 w0.254: v1(46.9,46.9) 46.9,49.4 47.5,50 51.9,50 52.373,49.527 52.373,49.24 52.74,48.873 53.027,48.873 54.3,47.6 v1(54.3,43.996)
  Bottom Layer w0.2: R144.2@45.7,46.917 45.717,46.9 v1(46.9,46.9) ; v1(54.3,43.996) 54.408,43.996 54.663,44.25 B19.41@56.012,44.25
RSVD_6: B19.42 R145.2 | length 14.6
  Signal L4 w0.254: v1(47.527,49) 51.7,49 52.7,48 v1(52.7,44.3)
  Bottom Layer w0.2: R145.2@45.7,49 v1(47.527,49) ; v1(52.7,44.3) 53.15,44.75 B19.42@56.012,44.75
RX_N: B19.5 R160.2 | length 8.6
  Bottom Layer w0.13: B19.5@59.5,49.238 59.585,49.323 59.585,50.885 59.778,51.078 61.467,52.767 61.467,54.823 61.46,54.83 61.46,55.815 61.373,55.902 60.898,55.902 R160.2@60.5,56.3
RX_P: B19.6 R161.2 | length 8.6
  Bottom Layer w0.13: B19.6@60,49.238 59.915,49.323 59.915,49.987 59.915,50.748 61.797,52.63 61.797,54.96 61.79,54.967 61.79,55.815 61.877,55.902 62.352,55.902 R161.2@62.75,56.3
RX_TF_N: C185.1 D20.1 D20.4 R159.2 R160.1 | length 35.4
  Signal L4 w0.13: v1(50.2,66.4) 50.2,66.273 50.372,66.1 50.372,63.639 51.911,62.1 58.742,62.1 59.893,60.949 59.893,60.841 59.612,60.56 59.317,60.56 v1(58.946,60.189)
  Bottom Layer w0.13: R159.2@49.5,68.3 49.898,67.902 50.373,67.902 50.46,67.815 50.46,66.711 50.2,66.451 v1(50.2,66.4) ; C185.1@57.25,61.857 57.341,61.857 57.967,61.23 57.967,61.14 58.918,60.189 v1(58.946,60.189) ; v1@58.946,60.2 59,60.2 59.379,59.821 59.386,59.821 60.388,58.819 60.388,58.312 R160.1@60.5,58.2 60.818,58.2 61.843,57.175 64.924,57.175 65,57.098 D20.4@65,56.55 65.3,56.55 65.815,56.035 68.189,56.035 68.365,56.211 68.365,57.91 68.06,58.215 67.735,58.215 D20.1@67.5,58.45
  Bottom Layer w0.2: R159.2@49.5,68.3 49.764,68.3 R159.2@50.163,67.902
RX_TF_P: C184.1 D20.3 D20.5 R158.2 R161.1 | length 35.2
  Signal L4 w0.13: v1(51,66.4) 51,66.273 50.828,66.1 50.828,65.936 51.158,65.606 51.158,65.352 50.828,65.021 50.828,64.767 51.158,64.437 51.158,64.183 50.828,63.853 50.828,63.828 51.208,63.447 51.675,63.447 51.855,63.268 51.855,62.801 51.901,62.755 52.1,62.555 52.6,62.555 53.099,62.555 53.557,63.013 53.811,63.013 54.268,62.555 54.522,62.555 54.979,63.013 55.233,63.013 55.69,62.555 55.944,62.555 56.401,63.013 56.655,63.013 57.113,62.555 57.367,62.555 57.824,63.013 58.078,63.013 58.535,62.555 58.6,62.555 58.931,62.555 59.143,62.343 59.189,62.297 59.871,62.297 60.051,62.117 60.051,61.435 60.343,61.143 60.348,61.137 60.348,60.841 60.425,60.765 60.735,60.765 v1(61.3,60.2)
  Bottom Layer w0.13: v1(51,66.4) 51,66.501 50.79,66.711 50.79,67.815 50.877,67.902 51.352,67.902 R158.2@51.75,68.3 ; C184.1@59.5,61.857 59.5,60.301 60.886,58.915 61.295,58.915 ; v1(61.3,60.2) 61.295,60.195 61.295,58.915 ; D20.3@67.5,56.55 66.55,56.55 65.535,57.565 65.535,58.215 65.3,58.45 D20.5@65,58.45 65,57.581 64.924,57.505 63.5,57.505 63.424,57.581 63.424,57.77 62.993,58.2 R161.1@62.75,58.2 62.352,58.598 62.002,58.598 61.685,58.915 61.295,58.915
  Bottom Layer w0.2: R158.2@51.063,67.902 51.461,68.3 R158.2@51.75,68.3
SI5351_CLK0: B15.10 TP24.1 U10.1 | length 6.2
  Top Layer w0.2: U10.1@54.5,42.416 54.5,43.117 54.9,43.517 54.9,44.825 54.5,45.225 TP24.1@54.5,46.75 B15.10@54.5,48.3
SI5351_CLK1: B15.9 TP25.1 U10.3 | length 6.1
  Top Layer w0.2: U10.3@53.5,42.416 TP25.1@53.5,45.25 53.5,46.9 54,47.4 B15.9@54,48.3
SI5351_XA: B15.2 Y1.1 | length 6.1
  Top Layer w0.2: Y1.1@51.6,56.85 53.15,56.85 54,56 B15.2@54,52.7
SI5351_XB: B15.3 Y1.3 | length 5.8
  Top Layer w0.2: Y1.3@49.4,55.15 49.5,55.15 50.55,54.1 53.2,54.1 53.5,53.8 B15.3@53.5,52.7
SPI_CLK: B1.12 B16.1 B17.1 B18.7 B19.33 J4.11 R168.1 | length 166.7
  Top Layer w0.2: v1(18.75,21.9) R168.1@18.75,23.15 ; v1(62.552,38.948) 62.5,39 62.5,44.25 65.6,47.35 ; v1(66.8,30.7) 66.8,29.815 66.5,29.515 66.5,25.717 66.617,25.6 72,25.6 72.425,25.175 B17.1@73.5,25.175 ; v1(67.1,63.546) 67.1,53.7 65.6,52.2 65.6,47.35 ; B16.1@73.5,46.521 73.25,46.521 72.421,47.35 65.6,47.35
  Signal L4 w0.2: v1(18.75,21.9) 18.75,12.55 19.2,12.1 ; J4.11@22.29,8.05 21.04,6.8 16.3,6.8 15.3,7.8 15.3,11.1 16.3,12.1 19.2,12.1 ; v1(62.552,38.948) 65.752,38.948 66.8,37.9 v1(66.8,30.7) 66.8,14.9 64,12.1 v1(52.7,12.1) 19.2,12.1
  Bottom Layer w0.2: B1.12@51.2,20.175 52.325,20.175 53,19.5 53,16.026 52.7,15.726 v1(52.7,12.1) ; B19.33@59,40.762 59,39.6 59.7,38.9 60.151,38.9 60.226,38.826 60.723,38.826 60.797,38.9 62.504,38.9 v1(62.552,38.948) ; v1(67.1,63.546) 67.754,64.2 68.5,64.2 B18.7@68.55,64.25
SPI_MISO: B1.14 B16.7 B17.7 B19.34 J4.9 R170.1 | length 128.2
  Top Layer w0.2: v1(23.25,21.9) R170.1@23.25,23.15 ; v1(24.8,13.3) 24.815,13.285 24.815,8.065 J4.9@24.83,8.05 ; v1(62.7,22) 66.726,22 67.026,21.7 72.424,21.7 72.899,22.175 B17.7@73.5,22.175 ; v1(64.5,37.7) 64,38.2 64,42 65.421,43.421 72.841,43.421 72.933,43.513 73.492,43.513 B16.7@73.5,43.521
  Signal L4 w0.2: v1(23.25,21.9) 23.25,14.791 24.741,13.3 62.9,13.3 64.85,15.25 64.85,22.35 ; v1(62.7,22) 64.5,22 64.8,22.3 64.85,22.35 ; v1(64.5,37.7) 65.249,37.7 65.7,37.249 65.7,32.8 64.85,31.95 64.85,22.35
  Bottom Layer w0.2: B1.14@51.2,21.475 55.475,21.475 55.95,21.95 62.65,21.95 v1(62.7,22) ; B19.34@58.5,40.762 58.5,39.4 59.552,38.348 63.852,38.348 v1(64.5,37.7)
SPI_MOSI: B1.13 B16.2 B17.2 B18.8 B19.35 J4.7 R169.1 | length 155.1
  Top Layer w0.2: v1(21,21.9) R169.1@21,23.15 ; J4.7@27.37,8.05 27.385,8.065 27.385,12.685 v1(27.4,12.7) ; v1(63.2,37.748) 63.2,39.742 63.2,43.3 v1(66.4,46.5) 66.408,46.5 66.858,46.95 71.916,46.95 72.845,46.021 B16.2@73.5,46.021 ; v1(64.7,49.4) 64.7,52.5 66.1,53.9 66.1,63.55 v1(67.35,64.8) ; v1(65.623,30.623) 65.623,26.028 66.451,25.2 71.824,25.2 72.349,24.675 B17.2@73.5,24.675
  Signal L4 w0.2: v1(21,21.9) 21,15.8 24.1,12.7 v1(27.4,12.7) v1(53.9,12.7) 63.534,12.7 65.6,14.766 65.6,30.383 65.623,30.406 65.623,31.623 66.3,32.3 66.3,37.5 65.5,38.3 63.649,38.3 63.2,37.851 v1(63.2,37.748) ; v1(64.7,49.4) 64.7,48.2 v1(66.4,46.5)
  Bottom Layer w0.2: B1.13@51.2,20.825 51.2,20.8 52.8,20.8 53.9,19.7 v1(53.9,12.7) ; B19.35@58,40.762 58,39.248 59.5,37.748 v1(63.2,37.748) ; v1(67.35,64.8) 67.375,64.775 68.525,64.775 B18.8@68.55,64.75
SWCLK: J8.1 U9.24 | length 40.2
  Top Layer w0.2: U9.24@35.217,27.507 35.217,26.483 v1(36.7,25)
  Signal L4 w0.254: v1(28.4,19.4) 34,25 v1(36.7,25)
  Bottom Layer w0.2: J8.1@7.8,14.5 9.5,14.5 11.4,12.6 25.5,12.6 28.4,15.5 v1(28.4,19.4)
SWD: J8.3 U9.25 | length 42.7
  Top Layer w0.2: U9.25@35.617,27.507 35.617,26.943 v1(36.68,25.88)
  Signal L4 w0.254: v1(27.3,19.7) 32.1,24.5 32.187,24.5 33.567,25.88 v1(36.68,25.88)
  Bottom Layer w0.2: J8.3@7.8,19.58 10.42,19.58 11.5,18.5 11.5,15.2 13.151,13.549 19,13.549 19.351,13.9 25.2,13.9 27.3,16 v1(27.3,19.7)
SY55857_D\0\: R118.1 U10.2 | length 6.1
  Top Layer w0.2: U10.2@54,42.416 54,41.4 54.4,41 55.741,41 56.05,41.309 R118.1@56.05,44
SY55857_D\1\: R119.1 U10.4 | length 3
  Top Layer w0.2: R119.1@51.2,44 51.2,43.983 51.598,43.585 52.798,43.585 53,43.383 U10.4@53,42.416
SY55857_Q0_N: C167.2 R114.1 R120.2 U10.9 | length 8.7
  Top Layer w0.2: R120.2@56.2,35.75 56.25,35.8 58.45,35.8 58.5,35.85 58.6,35.75 58.7,35.85 60.307,35.85 C167.2@60.457,36
  Top Layer w0.254: U10.9@54,38.084 54,38.061 54,36.3 54.43,35.87 54.459,35.841 56.109,35.841 R120.2@56.2,35.75
SY55857_Q0_P: C168.2 R115.1 R121.2 U10.8 | length 10.2
  Top Layer w0.2: R121.2@56.2,33.55 60.34,33.55 C168.2@60.457,33.667
  Top Layer w0.254: U10.8@53.5,38.084 53.5,35.9 55.027,34.373 55.85,33.55 R121.2@56.2,33.55
SY55857_Q1_N: C169.2 R116.1 R122.2 U10.7 | length 32.6
  Top Layer w0.254: U10.7@53,38.084 53,31.141 49.654,27.795 49.654,27.212 49.654,24.578 ccw(c49.908,24.578) 49.908,24.324 cw(c49.908,24.07) 49.908,23.816 ccw(c49.908,23.562) 49.908,23.308 49.931,23.308 cw(c49.931,23.054) 49.931,22.8 49.908,22.8 ccw(c49.908,22.546) 49.908,22.292 49.919,22.292 cw(c49.919,22.038) 49.919,21.784 49.908,21.784 ccw(c49.908,21.53) 49.654,21.53 49.654,20.895 49.654,20.595 52.395,17.854 55.088,17.854 55.092,17.85 R122.2@56.2,17.85 R116.1@58.4,17.85 60.44,17.85 C169.2@60.457,17.833
SY55857_Q1_P: C170.2 R117.1 R123.2 U10.6 | length 32.8
  Top Layer w0.254: U10.6@52.5,38.084 52.5,31.283 49.2,27.983 49.2,20.407 52.207,17.4 54.9,17.4 56.118,16.182 56.118,15.532 R123.2@56.2,15.45 R117.1@58.4,15.45 60.407,15.45 C170.2@60.457,15.5
THS427_IN+_Conversor_Diff_A_Simple1: B3.3 R53.2 R54.2 | length 7.7
  Top Layer w0.2: R53.2@91,45.8 91.001,45.425 91.001,45.002 ccw(c91.758,45.006) 91.262,44.434 ccw(c91.758,45.006) 91.263,44.433 ccw(c91.868,45.141) 91.792,44.213 ccw(c91.808,44.412) 91.805,44.212 R54.2@93.269,44.199 ; R54.2@93.27,44.199 93.275,44.199 R54.2@94,44.25 ; R54.2@94.35,44.25 96.093,42.507 96.896,42.507 B3.3@97.038,42.365
THS427_IN+_Conversor_Diff_A_Simple2: B5.3 R57.2 R58.2 | length 7.5
  Top Layer w0.2: R57.2@91.25,22.8 91.25,22.425 ccw(c92.191,22.372) 91.485,21.748 ccw(c92.712,22.847) 92.701,21.2 ; 92.701,21.2 R58.2@94.25,21.2 94.517,20.933 95.283,20.933 96.601,19.615 B5.3@97.038,19.615
THS427_IN-_Conversor_Diff_A_Simple1: B3.2 R51.1 R52.2 | length 9.7
  Top Layer w0.2: R52.2@94,45.8 R52.2@94.35,45.8 ; B3.2@97.038,43.635 96.813,43.86 96.29,43.86 R52.2@94.35,45.8 ; R51.1@98.8,47.5 98.765,46.775 98.75,46.46 cw(c98.55,46.47) 98.743,46.414 cw(c97.793,46.692) 98.499,45.999 cw(c98.357,46.14) 98.468,45.974 cw(c97.892,46.844) 97.889,45.8 R52.2@94.35,45.8
THS427_IN-_Conversor_Diff_A_Simple2: B5.2 R55.1 R56.2 | length 9.3
  Top Layer w0.2: B5.2@97.038,20.885 96.601,20.885 95.07,22.415 94.635,22.415 R56.2@94.25,22.8 94.975,22.8 98.094,22.8 ccw(c98.1,23.651) 98.5,22.9 ccw(c98.256,23.351) 98.768,23.332 98.775,23.525 R55.1@98.8,24.25
TOCAP: B19.20 C200.2 | length 14
  Bottom Layer w0.2: B19.20@64.488,44.25 63.45,44.25 63.2,44 63.2,42.1 64.3,41 68,41 70.75,38.25 C200.2@70.75,36.643
TX_N: B19.1 R156.2 | length 10.7
  Bottom Layer w0.2: R156.2@56,56.3 55.65,56.3 54.7,55.35 54.7,54.713 54.141,54.154 54.141,53.9 54.7,53.341 54.7,53.087 54.141,52.528 54.141,52.274 54.7,51.716 54.7,51.616 54.7,51.22 56.044,49.876 57.45,49.876 57.5,49.826 B19.1@57.5,49.238
TX_P: B19.2 R157.2 | length 11.3
  Bottom Layer w0.2: B19.2@58,49.238 57.95,49.288 57.95,50.1 57.774,50.276 56.21,50.276 55.1,51.385 55.1,54.615 55.879,55.394 56.994,55.394 57.9,56.3 R157.2@58.25,56.3
TX_TF_N: D19.1 D19.4 J10.3 R151.1 R156.1 | length 103.1
  Bottom Layer w0.13: R151.1@13.55,58.45 13.55,58.8 15.16,60.41 J10.3@17.55,60.41 17.55,61.439 17.626,61.515 17.744,61.515 18.468,60.79 18.468,60.03 17.757,59.319 16.752,59.319 16.558,59.125 15.863,58.43 15.67,58.237 15.67,53.93 15.863,53.737 17.337,52.263 17.53,52.07 20.87,52.07 21.063,52.263 22.737,53.937 22.93,54.13 22.93,65.33 34.4,76.8 34.8,77.2 36.225,77.2 cw(c36.225,77.008) 36.417,77.008 36.417,76.943 ccw(c36.609,76.943) 36.801,76.943 36.801,77.008 cw(c36.994,77.008) 37.186,77.008 37.186,76.884 ccw(c37.378,76.884) 37.57,76.884 37.57,77.008 cw(c37.762,77.008) 37.954,77.008 37.954,76.884 ccw(c38.146,76.884) 38.338,76.884 38.338,77.008 cw(c38.53,77.008) 38.722,77.008 38.722,76.884 ccw(c38.914,76.884) 39.106,76.884 39.106,77.008 cw(c39.298,77.008) 39.49,77.008 39.49,76.884 ccw(c39.682,76.884) 39.875,76.884 39.875,77.008 cw(c40.067,77.008) 40.259,77.008 40.259,76.884 ccw(c40.451,76.884) 40.643,76.884 40.643,77.008 cw(c40.835,77.008) 40.835,77.2 40.9,77.2 50.9,77.2 55.2,72.9 55.2,63 ; D19.1@51.3,62 51.3,62.7 51.6,63 55.2,63 ; D19.4@53.2,59.5 54.35,59.5 55.65,58.2 R156.1@56,58.2 56.398,58.598 56.873,58.598 56.96,58.685 56.96,59.448 55.2,61.208 55.2,63
TX_TF_P: D19.3 D19.5 J10.1 R149.1 R157.1 | length 103.6
  Bottom Layer w0.13: R149.1@13.55,60.7 13.55,61.05 15.45,62.95 J10.1@17.55,62.95 17.55,61.921 17.626,61.845 17.88,61.845 18.798,60.927 18.798,59.893 17.894,58.988 16.888,58.988 16,58.1 16,54.067 17.667,52.4 20.733,52.4 22.6,54.267 22.6,65.467 34.663,77.53 34.882,77.53 40.2,77.53 51.037,77.53 55.53,73.037 55.53,61.345 57.29,59.585 57.29,58.685 57.377,58.598 57.852,58.598 R157.1@58.25,58.2 57.9,58.2 57.185,57.485 54.011,57.485 52.531,58.965 51.535,58.965 51.3,59.2 D19.5@51.3,59.5 51.3,59.8 51.535,60.035 52.135,60.035 53.2,61.1 D19.3@53.2,62
UART0_RX: R174.1 TP38.1 | length 4.8
  Top Layer w0.2: R174.1@21.25,17.05 22.35,17.05 24.3,19 TP38.1@25.25,19
UART0_TX: R173.1 TP34.1 | length 7
  Top Layer w0.2: R173.1@19,17.05 19.35,17.05 20.3,16.1 23.2,16.1 24.1,17 TP34.1@25.25,17
UART1_RX: R44.1 R176.1 TP45.1 | length 74.4
  Top Layer w0.2: v1(39.8,9.6) 47.6,17.4 47.6,25.3 ; TP45.1@43.5,22.75 45.05,22.75 47.6,25.3 ; R176.1@46.7,29 46.7,28.65 47.6,27.75 47.6,25.3
  Signal L4 w0.2: v1(44.21,5.21) 44.21,5.19 45.1,4.3 66.5,4.3 67.5,5.3 v1(67.5,10.2)
  Bottom Layer w0.2: v1(39.8,9.6) 39.81,9.6 44.2,5.21 v1(44.21,5.21) ; v1(67.5,10.2) 71.3,10.2 73.8,12.7 R44.1@77.5,12.7
UART1_TX: R42.1 R175.1 TP41.1 | length 77.3
  Top Layer w0.2: v1(38.872,8.672) 38.872,11.572 43.5,16.2 v1(43.5,18.6) ; v1(43.438,25.048) 43.469,25.017 43.469,24.281 TP41.1@43.5,24.25 45.55,24.25 46.7,25.4 R175.1@46.7,26.75
  Signal L4 w0.2: v1(43.272,4.45) 43.272,4.414 43.678,4.008 43.678,3.866 44.022,3.522 67.278,3.522 68.178,4.422 68.178,10.622 v1(67.5,11.3) ; v1(43.438,25.048) 43.469,25.017 43.469,18.631 v1(43.5,18.6)
  Bottom Layer w0.2: v1(38.872,8.672) 38.961,8.672 43.183,4.45 v1(43.272,4.45) ; v1(67.5,11.3) 70.844,11.3 73.444,13.9 78.5,13.9 79.265,13.135 79.265,13.098 79.664,12.7 R42.1@80,12.7
USB0_N: B6.4 R67.2 TP55.1 | length 45.8
  Top Layer w0.16: B6.4@13.1,29.5 13.4,29.5 14.048,30.148 14.048,30.639 14.739,31.33 14.976,31.33 15.33,30.976 15.5,30.976 TP55.1@15.5,30.75 15.5,30.77 16.05,31.32 16.332,31.32 17.349,31.32 19.26,33.231 19.26,40.36 23.53,44.63 27.13,44.63 28.1,45.6 36.3,45.6 36.7,45.2 36.7,42 35.94,41.24 34.138,41.24 33.57,40.672 33.57,38.928 33.908,38.59 33.908,37.942 R67.2@34.3,37.55
USB0_P: B6.6 R65.2 TP54.1 | length 45.7
  Top Layer w0.16: B6.6@13.1,31.4 13.4,31.4 13.593,31.207 14.107,31.207 14.59,31.69 14.965,31.69 15.299,32.024 15.55,32.024 TP54.1@15.55,32.25 15.55,32.18 16.05,31.68 16.183,31.68 17.2,31.68 18.9,33.38 18.9,33.9 18.9,34.422 ccw(c18.693,34.422) 18.693,34.629 18.611,34.629 cw(c18.611,34.836) 18.611,35.043 18.693,35.043 ccw(c18.693,35.25) 18.693,35.457 18.345,35.457 cw(c18.345,35.664) 18.345,35.871 18.693,35.871 ccw(c18.693,36.078) 18.693,36.285 18.345,36.285 cw(c18.345,36.492) 18.345,36.699 18.693,36.699 ccw(c18.693,36.906) 18.9,36.906 18.9,37.4 18.9,40.509 23.381,44.99 26.981,44.99 27.951,45.96 36.449,45.96 37.06,45.349 37.06,41.851 36.089,40.88 34.704,40.88 34.61,40.786 34.61,40.11 R65.2@34.3,39.8
USB_CC1: J7.A5 R64.2 | length 17.2
  Top Layer w0.152: J7.A5@7.95,33.05 6.831,33.05 6.681,33.2 5.9,33.2 5.4,32.7 5.4,27.31 6.358,26.352 8.613,26.352 9.111,26.85 11.367,26.85 12.217,27.7 R64.2@13.45,27.7
USB_CC2: J7.B5 R63.2 | length 9.4
  Top Layer w0.152: J7.B5@7.95,30.05 7.932,30.032 6.932,30.032 6.049,29.149 6.049,27.159 6.504,26.704 8.246,26.704 9.242,27.7 R63.2@10.55,27.7
USB_N: B6.3 J7.A7 J7.B7 | length 8.6
  Top Layer w0.15: v1(6.2,32.5) 6.236,32.536 7.936,32.536 J7.B7@7.95,32.55
  Top Layer w0.16: v1(6.95,31.55) J7.A7@7.95,31.55 8.02,31.62 8.93,31.62 9.04,31.51 9.04,30.975 9.345,30.67 9.626,30.67 9.72,30.576 9.72,29.834 9.867,29.687 10.413,29.687 B6.3@10.6,29.5
  Bottom Layer w0.15: v1(6.2,32.5) 6.221,32.479 6.621,32.479 6.95,32.15 v1(6.95,31.55)
USB_P: B6.1 J7.A6 J7.B6 | length 7.5
  Top Layer w0.16: J7.B6@7.95,31.05 7.918,31.018 7.238,31.018 7.19,30.97 6.71,30.97 6.37,31.31 6.37,31.79 6.71,32.13 7.19,32.13 7.238,32.082 7.918,32.082 8.02,31.98 9.079,31.98 9.4,31.659 9.4,31.124 9.494,31.03 9.93,31.03 10.3,31.4 B6.1@10.6,31.4
USB_VBUS: B6.5 C72.1 FB6.1 J7.A4-B9 J7.B4-A9 | length 17.3
  Top Layer w0.3: J7.B4-A9@7.95,29.4 9.287,29.4 10.037,28.65 11.145,28.65 11.95,29.455 11.95,30.45 ; FB6.1@10.724,34.7 10.724,33.712 11.95,32.486 11.95,31.364 11.95,30.45 ; B6.5@13.1,30.45 11.95,30.45
  Top Layer w0.5: J7.A4-B9@7.95,34.2 9,34.2 9.5,34.7 FB6.1@10.724,34.7 10.75,34.726 10.75,35.65 10.1,36.3 C72.1@10.1,37.2
VBUS: C73.1 D17.2 FB6.2 | length 84.5
  Top Layer w0.7: FB6.2@11.976,34.7 11.976,34.726 12.75,35.5 C73.1@12.75,37.024 ; D17.2@61.994,71.85 61.994,70.206 v1(62,70.2)
  Top Layer w1: C73.1@12.75,37.024 15.924,37.024 18,39.1 18,43 22.3,47.3 22.3,64.6 v1(19.9,67)
  PWR w1: v1(19.9,67) 33.3,67 36.5,70.2 v1(62,70.2)
XOUT: C86.2 R69.1 X1.3 | length 4.8
  Top Layer w0.2: C86.2@34.225,18.5 34.225,20.7 X1.3@34.275,20.75 34.575,20.45 R69.1@36.7,20.45
pads on no net: B1.10 B3.1 B3.5 B3.8 B5.1 B5.5 B5.8 B8.1 B8.5 B8.8 B9.1 B9.5 B9.8 B10.1 B10.5 B10.8 B11.1 B11.5 B11.8 B15.6 B16.10 B16.11 B16.13 B16.14 B16.16 B16.17 B16.30 B16.31 B17.10 B17.11 B17.13 B17.14 B17.16 B17.17 B17.30 B17.31 B19.7 B19.12 B19.13 B19.18 B19.24 B19.26 B19.31 B19.46 B19.47 J1.15 J1.16 J6.11 J6.13 J6.15 J7. J7.A8 J7.B8 J10.7 J10.8 J10.MH3 J10.MH4 RLY1.5 RLY1.6 RLY1.7 RLY2.5 RLY2.6 RLY2.7 SW1.1 SW1.4 SW2.1 SW2.4 U1.1 U1.5 U1.8 U2.1 U2.5 U2.8 U3.1 U3.5 U3.8 U4.1 U4.5 U4.8 U8.9

## Polygon pours and split planes (outlines as drawn)
GND on Top Layer "GND_L01_P081" (solid, remove dead copper, pour order 81): -2.5,92.5 192.5,92.5 192.5,-5 -2.5,-5
GND on Top Layer "Top Layer-GND 4" (solid, pour order 99): 364 vertices, not listed, extent 124.573,48.626 146.917,57.859
GND on Top Layer "Top Layer-GND 9" (solid, pour order 86): 360 vertices, not listed, extent 124.323,72.876 146.917,83.859
+5V on Top Layer "+5V_L01_P076" (solid, remove dead copper, pour order 76): 73.2,87 73.2,84.7 73.7,84.2 74.7,84.2 74.7,81.4 71.9,81.4 71.3,80.8 71.3,76.55 68.25,73.5 61.1,73.5 61.1,82 46.5,82 44.5,84 22.75,84 19.65,80.9 16.65,80.9 15.25,79.5 15.25,77.3 12.8,77.3 12.8,80.5 13.8,81.5 17.5,81.5 20.375,84.375 20.375,86.375 20.75,86.75 50.25,86.75 50.25,83.25 54.25,83.25 54.25,87 65.5,87 65.5,83.3 68.5,83.3 68.5,87
GND on Top Layer "GND_L01_P032" (solid, remove dead copper, pour order 32): 21,76.2 21,71 27.2,71 27.2,60.9 23.9,60.9 23.9,64.8 20.5,68.2 2.5,68.2 2.5,76.2
LDO_OUT on Top Layer "LDO_OUT_L01_P075" (solid, remove dead copper, pour order 75): 58.25,73.5 60.9,73.5 60.9,79.1 63.8,79.1 63.8,85.2 55.8,85.2 55.8,81.7 48.5,81.7 48.5,77 58.25,77
GND on Top Layer "GND_L01_P023" (solid, pour order 23): 0,0 3,0 3,91 0,91
GND on Top Layer "Top Layer-GND" (solid, pour order 40): 133.473,23.61 133.558,23.605 133.656,23.585 133.71,23.567 133.765,23.556 133.816,23.531 133.87,23.513 133.917,23.481 133.968,23.456 134.051,23.401 134.094,23.363 134.141,23.332 134.178,23.289 134.221,23.252 134.252,23.204 134.29,23.162 134.345,23.079 134.37,23.028 134.402,22.981 134.42,22.927 134.445,22.876 134.456,22.82 134.475,22.767 134.494,22.669 134.499,22.584 134.511,22.5 134.511,21 134.499,20.916 134.494,20.831 134.475,20.733 134.456,20.68 134.445,20.624 134.42,20.573 134.402,20.519 134.37,20.472 134.345,20.421 134.29,20.338 134.252,20.296 134.221,20.248 134.178,20.211 134.141,20.168 134.094,20.137 134.051,20.099 133.971,20.046 133.966,20.026 133.804,19.635 133.77,19.576 133.742,19.514 133.521,19.153 133.478,19.1 133.441,19.043 133.205,18.766 133.197,18.753 133.172,18.727 133.166,18.721 133.157,18.712 133.123,18.668 132.728,18.272 132.713,18.261 132.681,18.223 132.756,18.166 132.893,17.986 132.98,17.777 133.01,17.553 133.01,16.107 132.98,15.883 132.893,15.674 132.756,15.494 132.576,15.357 132.367,15.27 132.143,15.241 130.697,15.241 130.473,15.27 130.264,15.357 130.084,15.494 129.947,15.674 129.86,15.883 129.831,16.107 129.831,17.553 129.86,17.777 129.947,17.986 130.084,18.166 130.264,18.303 130.473,18.39 130.51,18.395 130.593,18.67 130.629,18.748 130.658,18.827 130.856,19.197 130.906,19.267 130.951,19.339 131.193,19.634 131.198,19.642 131.209,19.654 131.217,19.663 131.239,19.684 131.272,19.728 131.668,20.123 131.692,20.141 131.861,20.348 131.918,20.453 131.908,20.472 131.877,20.519 131.858,20.573 131.833,20.624 131.822,20.68 131.804,20.733 131.784,20.831 131.779,20.916 131.768,21 131.768,22.5 131.779,22.584 131.784,22.669 131.804,22.767 131.822,22.82 131.833,22.876 131.858,22.927 131.877,22.981 131.908,23.028 131.933,23.079 131.988,23.162 132.026,23.204 132.057,23.252 132.1,23.289 132.138,23.332 132.185,23.363 132.228,23.401 132.31,23.456 132.361,23.481 132.408,23.513 132.462,23.531 132.513,23.556 132.569,23.567 132.623,23.585 132.72,23.605 132.805,23.61 132.889,23.621 133.389,23.621